# EAGLE board Servo-potenciom-2 (EAGLE 7.2.0)
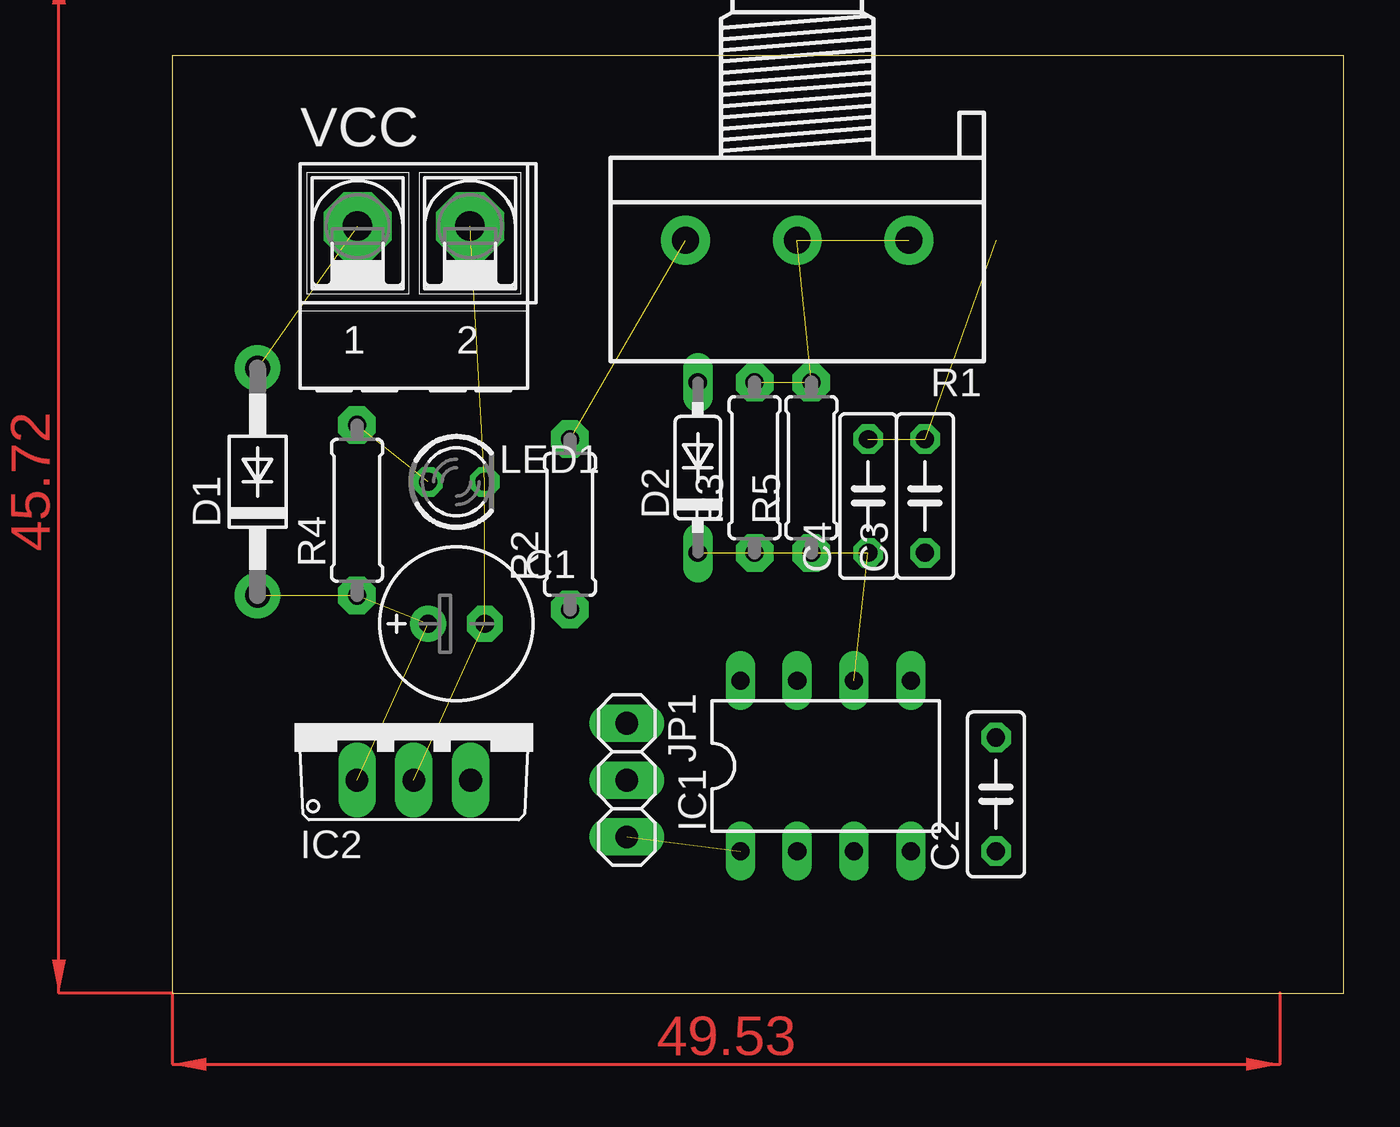
[diagram p0: board, top side]
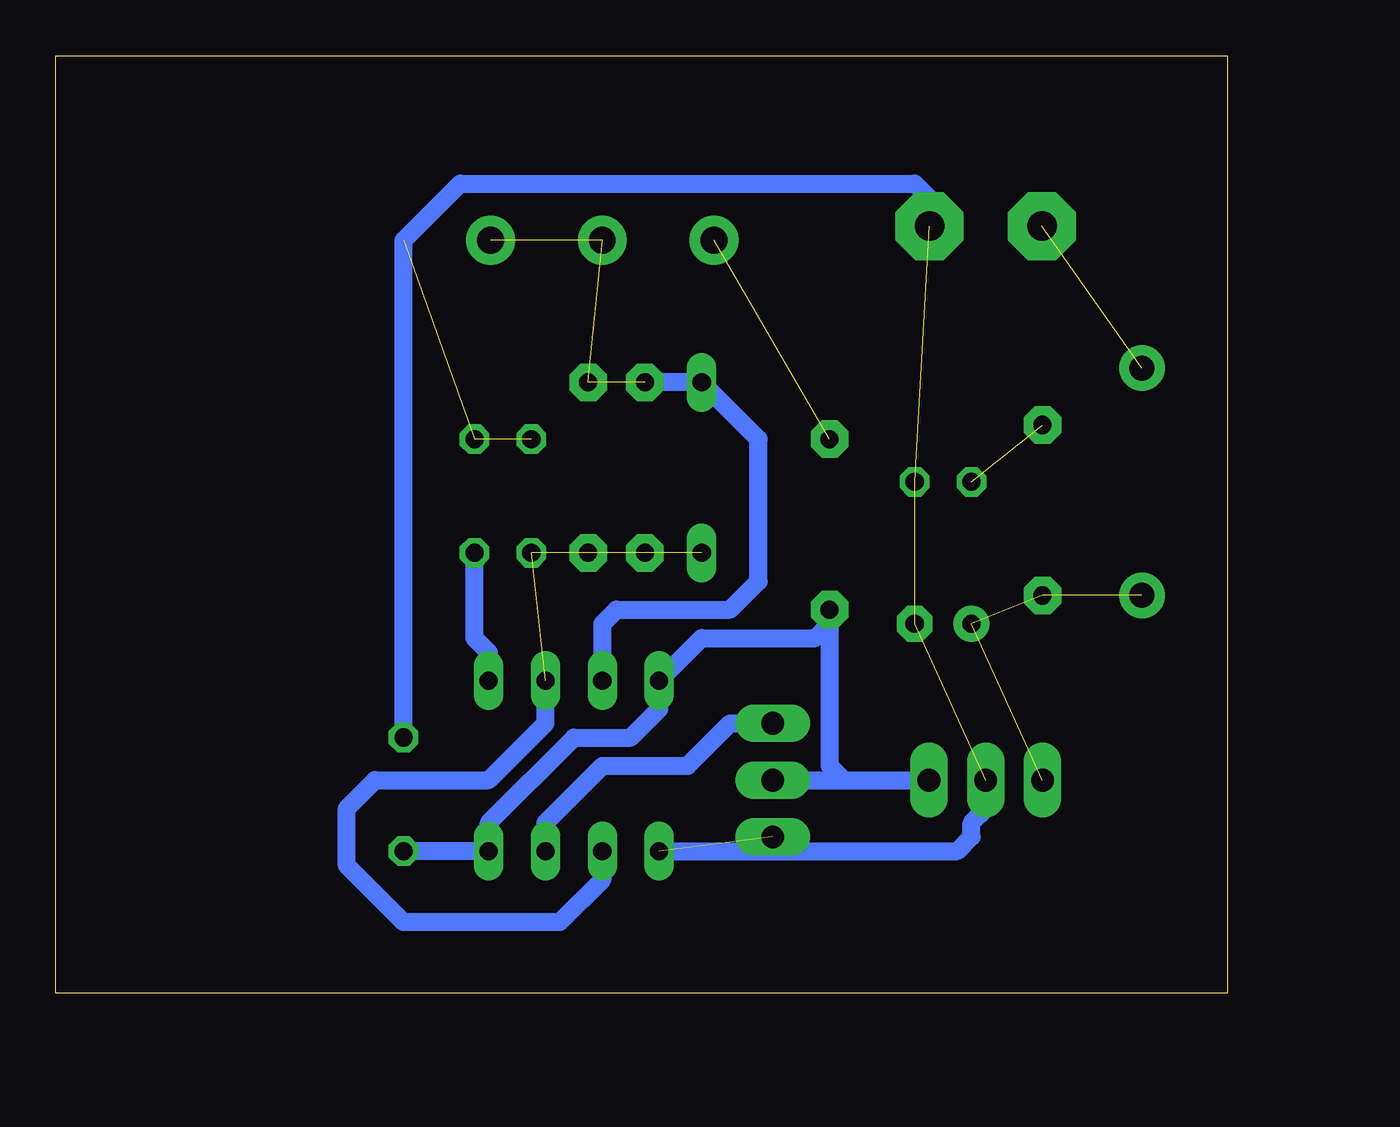
[diagram p1: board, bottom side, seen from below]

Size 52.38 x 41.9 mm. Coordinates in mm from the lower left corner, seen from the top.
Outline: 0,0 52.38,0 52.38,41.9 0,41.9 0,0
Copper layers (1*16): Top 0.035mm / dielectric 1.5mm / Bottom 0.035mm
Design rules "default": minimum track width 10mil, minimum drill 24mil, track to track 8mil, track to pad 8mil, pad to pad 8mil, via to via 8mil, smd to smd 8mil, copper to edge 40mil, drill to drill 8mil, minimum pad ring 10mil, minimum via ring 8mil, stop-mask expansion 4mil, vias tented up to drill 0mil, thermal gap 10mil

## Footprints (pad centres in the part's own frame; a part is rotated, then mirrored left to right if it is on the bottom)
E2,5-7 = drill 0.813 pad 1.6: + -1.27,0 | drill 0.813 pad 1.6 octagon: - 1.27,0
C050-025X075 = drill 0.813 octagon: 1 -2.54,0; 2 2.54,0
DO41-10 = drill 1.118 pad 2.032: A 5.08,0; C -5.08,0
DO35-7 = drill 0.813 long: A 3.81,0; C -3.81,0
DIL-08 = drill 0.813 long: 1 -3.81,-3.81; 2 -1.27,-3.81; 3 1.27,-3.81; 4 3.81,-3.81; 5 3.81,3.81; 6 1.27,3.81; 7 -1.27,3.81; 8 -3.81,3.81
TO220V = drill 1.016 pad 1.676 long: 1 -2.54,-2.54; 2 0,-2.54; 3 2.54,-2.54
1X03 = drill 1.016 pad 1.676 long: 1 -2.54,0; 2 0,0; 3 2.54,0
LED3MM = drill 0.813 octagon: A -1.27,0; K 1.27,0
3RP/1610N = drill 1.2 pad 2.184: 1 -5,0; 2 0,0; 3 5,0
0207/7 = drill 0.813 pad 1.676 octagon: 1 -3.81,0; 2 3.81,0
AK500/2-H = drill 1.321 pad 3.048 octagon: 1 -2.515,0; 2 2.515,0

## Placement (x,y rotation side)
C1  220uF/16V  [E2,5-7]  12.7,16.51 0 top
C2  100nF  [C050-025X075]  36.83,8.89 90 top
C3  10nF  [C050-025X075]  33.66,22.23 90 top
C4  100nF  [C050-025X075]  31.11,22.23 90 top
D1  1N4004  [DO41-10]  3.81,22.86 90 top
D2  1N4148DO35-7  [DO35-7]  23.5,23.49 90 top
IC1  NE555  [DIL-08]  29.21,10.16 0 top
IC2  7805TV  [TO220V]  10.79,12.06 0 top
JP1  SERVO  [1X03]  20.32,9.53 270 top
LED1  ROJO  [LED3MM]  12.7,22.86 0 top
R1  10K  [3RP/1610N]  27.94,33.66 180 top
R2  10K  [0207/7]  17.78,20.95 90 top
R3  390K  [0207/7]  26.04,23.49 90 top
R4  1K  [0207/7]  8.26,21.59 90 top
R5  390K  [0207/7]  28.57,23.49 90 top
VCC  +12V  [AK500/2-H]  10.79,34.29 0 top

## Library data of the parts
C1-C4 = rcl
D1 D2 = diode
IC1 = st-microelectronics; MF: Arrow Electronics; MPN: NE555N; OC_FARNELL: 1467742; OC_NEWARK: 89K1486
IC2 = linear
JP1 = pinhead
LED1 = led
R1 = pot
R2-R5 = resistor
VCC = con-ptr500; OC_FARNELL: unknown; OC_NEWARK: unknown

## Nets
+5V: C2.1 IC1.4 IC1.8 IC2.3 JP1.2 R2.1
GND: C1.- C2.2 C3.2 C4.2 IC1.1 IC2.2 JP1.3 LED1.K VCC.2
N$1: D1.A VCC.1
N$2: C1.+ D1.C IC2.1 R4.1
N$3: IC1.3 JP1.1
N$4: C3.1 IC1.5
N$5: R1.3 R2.2
N$6: D2.A IC1.7 R1.1 R1.2 R3.2 R5.2
N$7: C4.1 D2.C IC1.2 IC1.6 R3.1 R5.1
N$8: LED1.A R4.2

## Tracks (layer width: path | path; a pad name or v marks a point on that pad's centre or on a via)
+5V
  Bottom 0.813: JP1.2 17.14,9.53 | 17.14,9.53 IC2.3 | R2.1 17.78,16.51 | 17.78,16.51 17.78,10.16 17.14,9.53 | 17.78,16.51 18.41,15.88 23.5,15.88 IC1.8 25.4,12.7 26.67,11.43 29.21,11.43 33.02,7.62 IC1.4 C2.1
GND  (6 unrouted)
  Bottom 0.813: IC1.1 12.06,6.35 11.43,6.99 11.43,7.62 10.79,8.26 IC2.2 | C2.2 36.83,33.66 34.29,36.2 13.97,36.2 12.7,34.92 12.7,34.9 VCC.2
N$1  (1 unrouted)
N$2  (3 unrouted)
N$3
  Bottom 0.813: IC1.3 30.48,7.62 27.94,10.16 24.13,10.16 22.23,12.06 JP1.1
N$4
  Bottom 0.813: IC1.5 33.02,15.24 33.66,15.88 C3.1
N$5  (1 unrouted)
N$6  (3 unrouted)
  Bottom 0.813: IC1.7 27.94,16.51 27.3,17.15 22.23,17.15 20.95,18.41 20.95,24.77 D2.A R3.2
N$7  (4 unrouted)
  Bottom 0.813: IC1.2 27.94,5.08 29.84,3.18 36.83,3.18 39.37,5.71 39.37,8.26 38.1,9.53 33.02,9.53 30.48,12.06 IC1.6
N$8  (1 unrouted)
(copper drawn outside any net)
  shapes: Top area x2